# Altium PCB Breath.PcbDoc
Units mil, origin at the board's own origin, x right, y up, seen from the top; angles counter-clockwise.
Board outline 6000 x 4000 mil, 2 copper layers (Top Layer, Bottom Layer); 7 components, 6 nets, 23 pads, 0 vias.
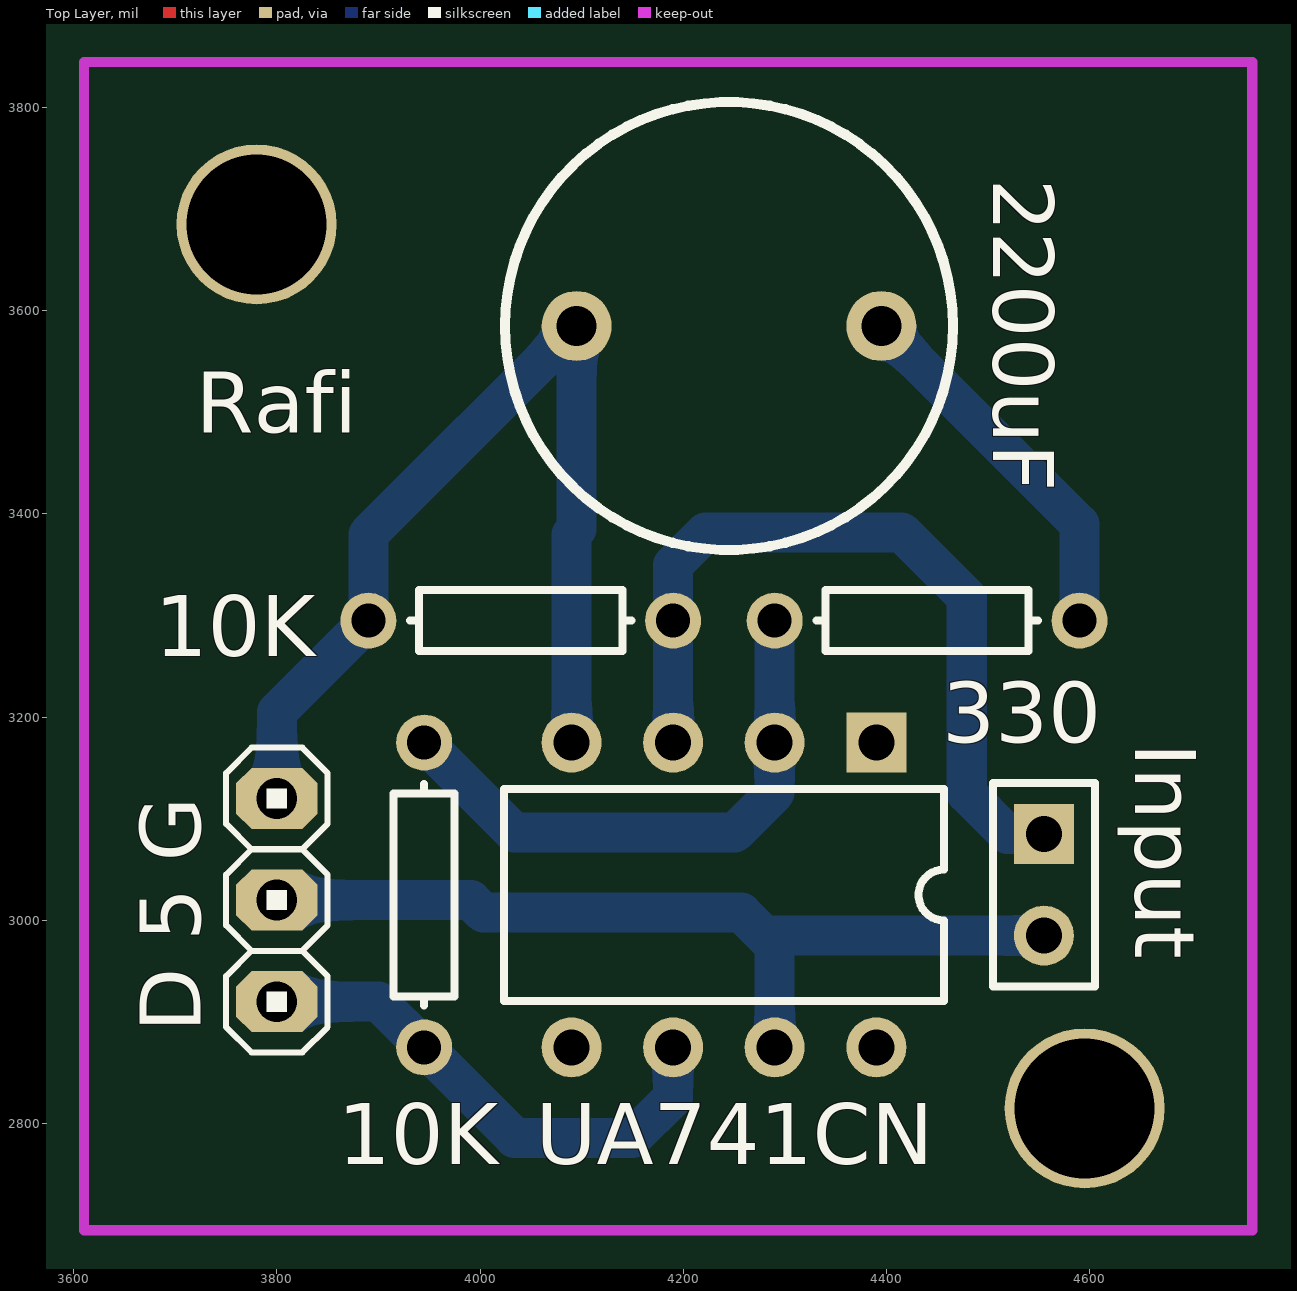
[diagram p0: Top Layer view]
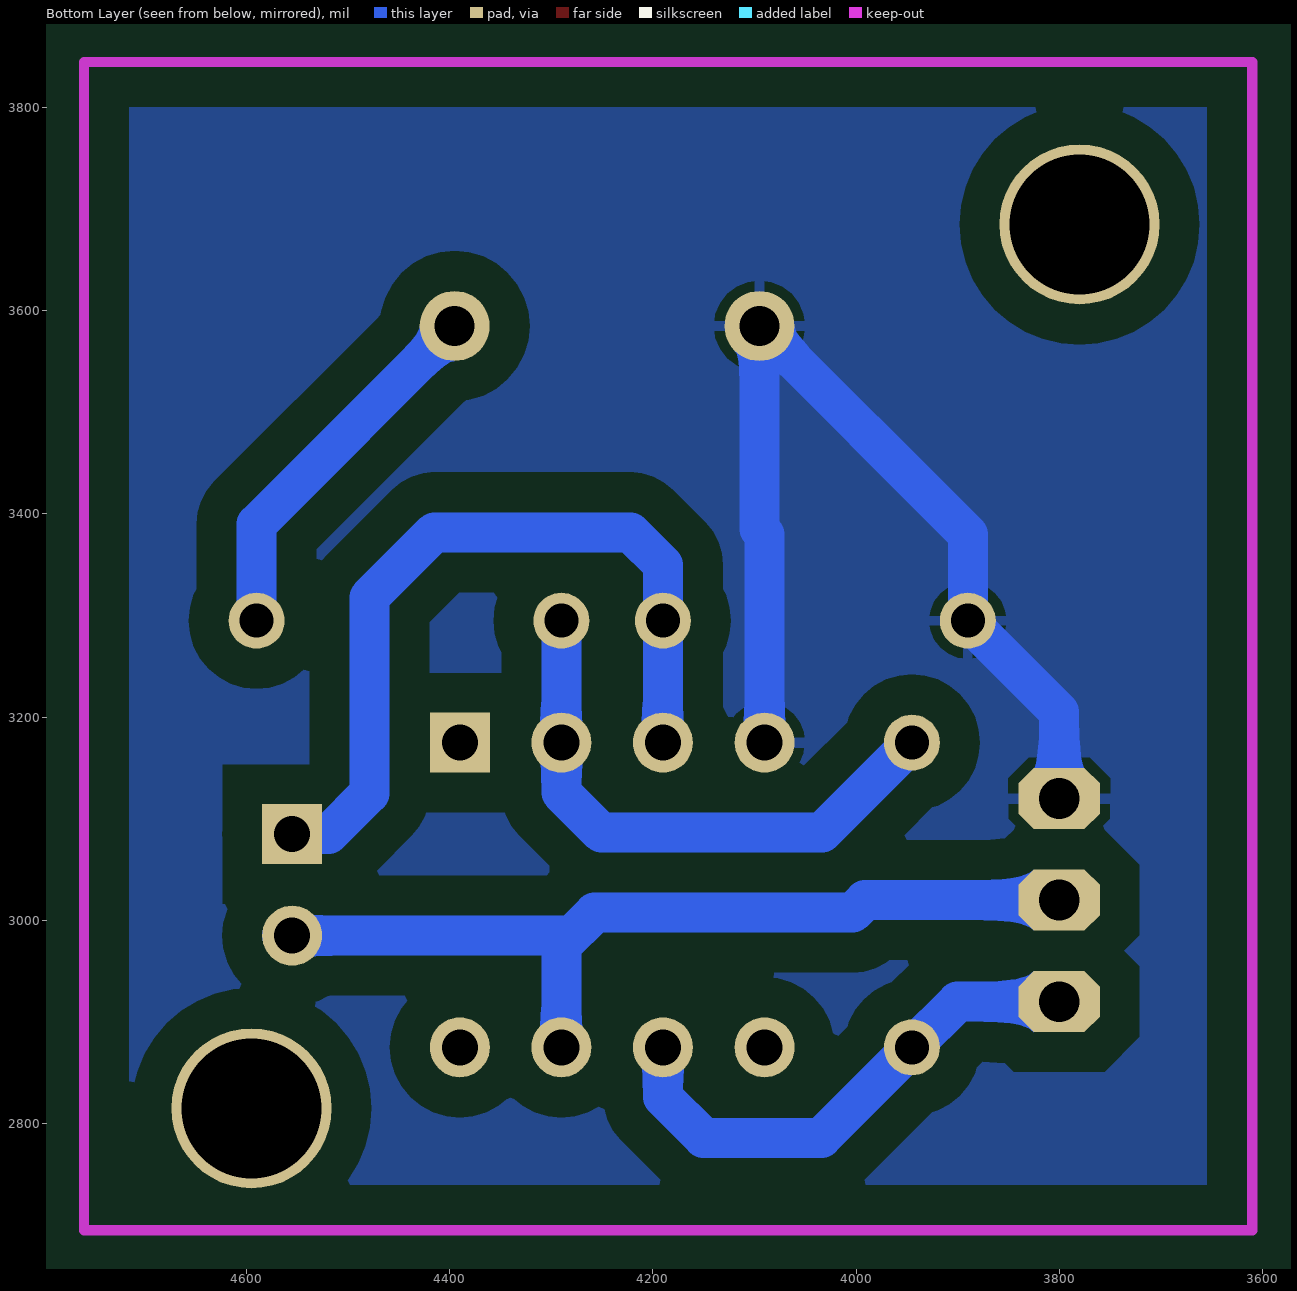
[diagram p1: Bottom Layer view, seen from below]

## Layer stack, top to bottom
Top Solder: solder mask 0.4, Solder Resist, Dk 3.5
Top Layer: signal copper 1.4
Dielectric 1: dielectric 12.6, FR-4, Dk 4.8
Bottom Layer: signal copper 1.4
Bottom Solder: solder mask 0.4, Solder Resist, Dk 3.5

## Board outline
1000,1000 7000,1000 7000,5000 1000,5000

## Design rules (kind name [scope] priority, off if disabled: settings)
Clearance [All] p1: gap=39.37
PolygonConnect [All] p1: connectstyle=Relief reliefconductorwidth=10 reliefentries=4 polygonreliefangle="90 Angle" airgapwidth=10
RoutingVias [All] p1: holewidth=28 width=50 viastyle="Through Hole" minholewidth=28 minwidth=50 maxholewidth=28 maxwidth=50
SolderMaskExpansion [All] p1: expansion=4
Width [All] p1: maxlimit=39.37 minlimit=39.37 preferedwidth=39.37
30 further rules are at their usual default settings.

## Components (designator, comment, footprint, x,y, rotation, side; value= is the part's Value field where it differs from the comment)
10K "10K" AXIAL-0.3 4040,3295 r180 top (schematic designator 10K-2)
10K "10K" AXIAL-0.3 3945,3025 r90 top (schematic designator "10K Juga")
330 "330" AXIAL-0.3 4440,3295 r180 top (schematic designator 330-2)
2200uF "2200uF" RAD-0.3 4245,3585 r180 top
"D 5 G" "Output" My_1X03 3800,3020 r270 top (schematic designator o)
Input "Input" HDR1X2 4555,3085 r270 top (schematic designator PPP)
UA741CN "UA741CN" DIP8 4240,3025 r180 top

## Footprints (in the part's own frame and the unit in brackets; to place one, negate y for a bottom-side part, rotate by r counter-clockwise, add the part's x,y. Pads: shape width x height; smd on the part's side, far side on the other; paste and mask are expansions set on the pad)
AXIAL-0.3 [mm] "Axial Device, Thru-Hole; 2 Leads; 0.3 in Pin Spacing"
  round 1.4 hole 0.85: 1(-3.81,0) 2(3.81,0)
  silkscreen extent -2.77,-0.76 2.77,0.76
DIP8 [mm] "DIP; 8 Leads; Row Spacing 7.62 mm; Pitch 2.54 mm"
  rect 1.5x1.5 hole 0.9: 1(-3.81,-3.81)
  round 1.5 hole 0.9: 2(-1.27,-3.81) 3(1.27,-3.81) 4(3.81,-3.81) 5(3.81,3.81) 6(1.27,3.81) 7(-1.27,3.81) 8(-3.81,3.81)
  silkscreen extent -5.5,-2.65 5.5,2.65
HDR1X2 [mm] "Connector; Header; 2 Position"
  rect 1.5x1.5 hole 0.9: 1(0,0)
  round 1.5 hole 0.9: 2(2.54,0)
  silkscreen extent -1.27,-1.27 3.81,1.27
My_1X03 [mil]
  oct 60x80 hole 40: 1(-100,0) 2(0,0) 3(100,0)
  silkscreen extent -150,-50 150,50
RAD-0.3 [mm] "Radial Cap, Thru-Hole; 2 Leads; 0.3 in Pin Spacing"
  round 1.75 hole 1: 1(-3.81,0) 2(3.81,0)

## Part data
10K 10K 330: library part Res1, "Resistor"
2200uF: library part Cap, "Capacitor"
"D 5 G": library part "Header 3", "Header, 3-Pin"
Input: library part "Header 2", "Header, 2-Pin"
UA741CN: "General-Purpose Single Operational Amplifier"

## Free pads (board coordinates)
  round 157.48 hole 137.8: 9(3780,3685) 9(4595,2815)

## Nets (pads, with @x,y where several pads share a name; then routed paths per layer and width w, separated by ;. In a path a pad name is that pad's centre, name@x,y a point inside that pad or via, vN(x,y) a via of type N, cw(c..) or ccw(c..) an arc to the next point about the centre after c; other vN are vias at no path point)
+5: "D 5 G.2" Input.2 UA741CN.7 | length 883.6
  Bottom Layer w39.37: 3800,3020 3991,3020 4003.33,3007.67 4257.33,3007.67 4290,2975 UA741CN.7 ; 4290,2985 Input.2@4565,2985
GND: 10K.2@3890,3295 2200uF.2 "D 5 G.1" UA741CN.4 | length 999.3
  Bottom Layer w39.37: 3800,3120 3800,3205 3890,3295 3890,3380 2200uF.2 4095,3385 4090,3380 UA741CN.4
"Net10K Juga_1": 10K.1@3945,2875 "D 5 G.3" UA741CN.6 | length 511.1
  Bottom Layer w39.37: 3800,2920 3900,2920 3945,2875 4034,2786 4150,2786 4190,2826 UA741CN.6
"Net10K Juga_2": 10K.2@3945,3175 330.2 UA741CN.2 | length 567.2
  Bottom Layer w39.37: 10K.2@3945,3175 4033.58,3086.42 4250.61,3086.42 4290,3125.81 UA741CN.2 330.2
Net10K-2_1: 10K.1@4190,3295 Input.1 UA741CN.3 | length 799.3
  Bottom Layer w39.37: UA741CN.3 4190,3295 4190,3350 4222,3382 4415,3382 4479,3318 4479,3125 4519,3085 Input.1@4565,3085
Net330-2_1: 330.1 2200uF.1 | length 370.8
  Bottom Layer w39.37: 2200uF.1 4590,3390 330.1
pads on no net: UA741CN.1 UA741CN.5 UA741CN.8

## Polygon pours and split planes (outlines as drawn)
GND on Bottom Layer "Bottom Layer-GND" (solid, pour order 2): 3610,3845 4755,3845 4760,3840 4760,3845 4760,2695 3610,2695 3610,3845

## Keep-outs
Keep-Out Layer:
  lines w10: 3610,2695 3610,3845 4760,3845 4760,2695 3610,2695

## Silkscreen, mask and mechanical layers (free items; w line width, h text height)
Top Overlay:
  circle w10: c4245,3585 r220.47
  text "Rafi" at 3720,3480 h60